# EAGLE board cradle project (EAGLE 7.7.0)
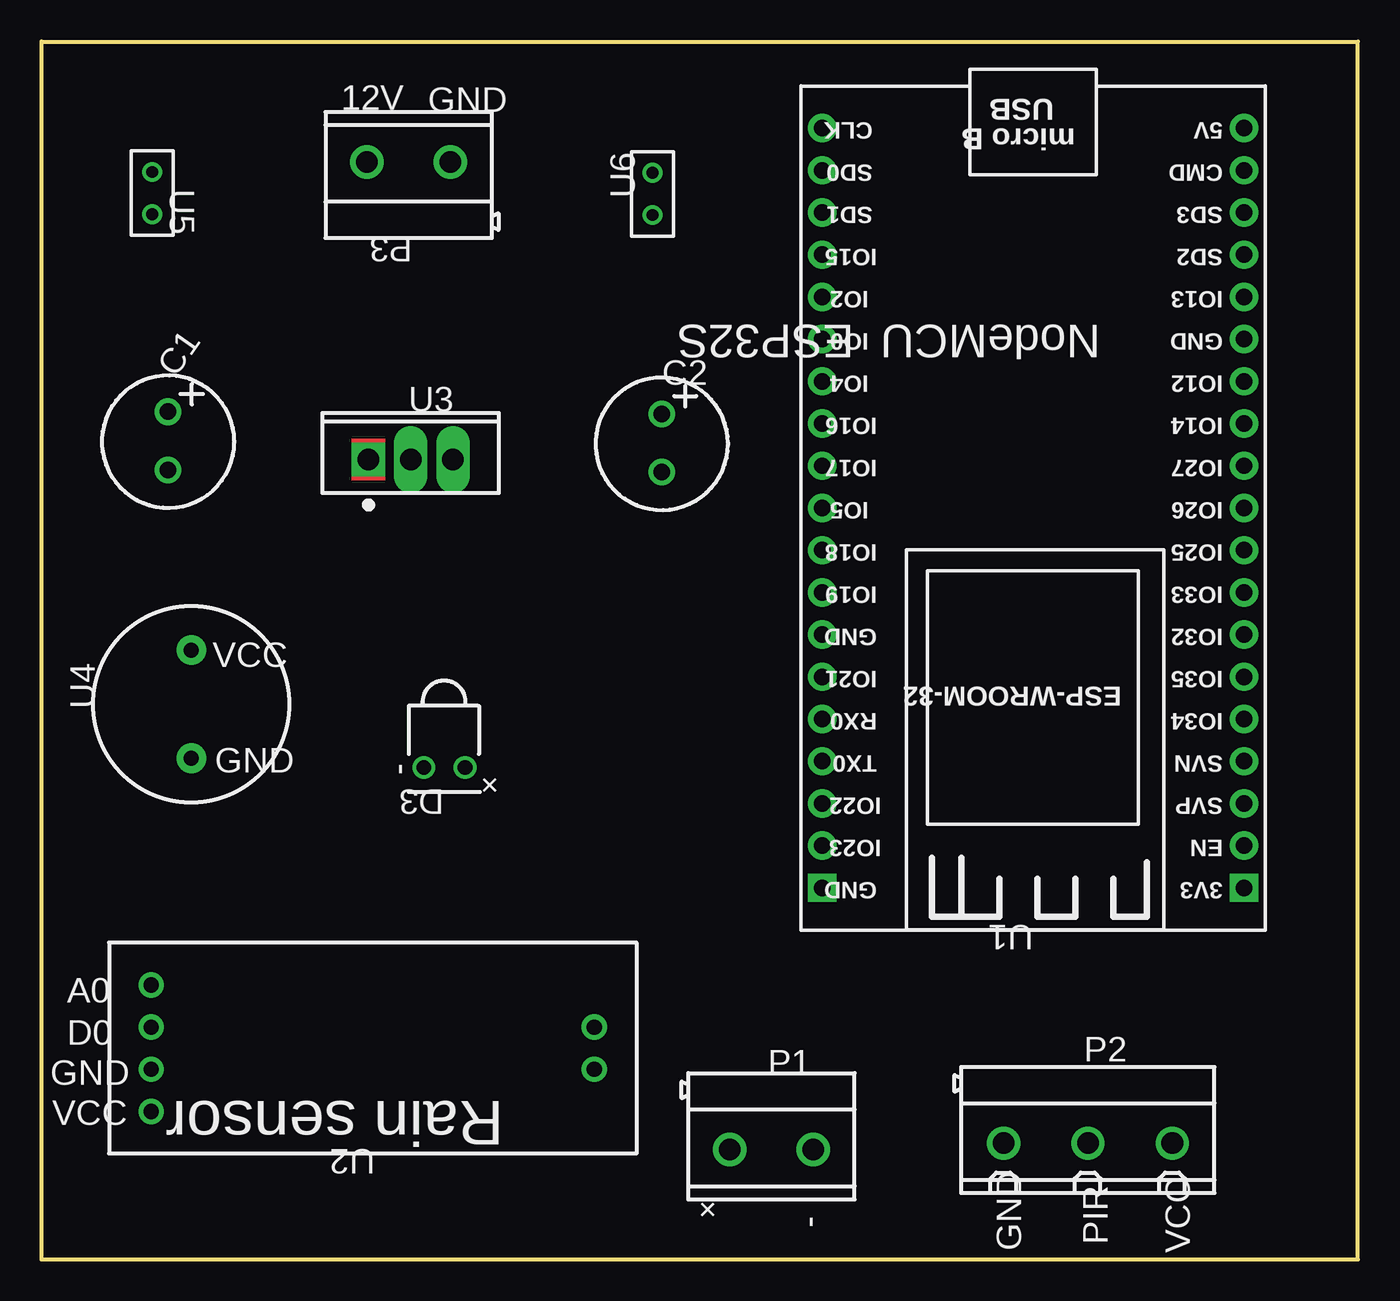
[diagram p0: board, top side]
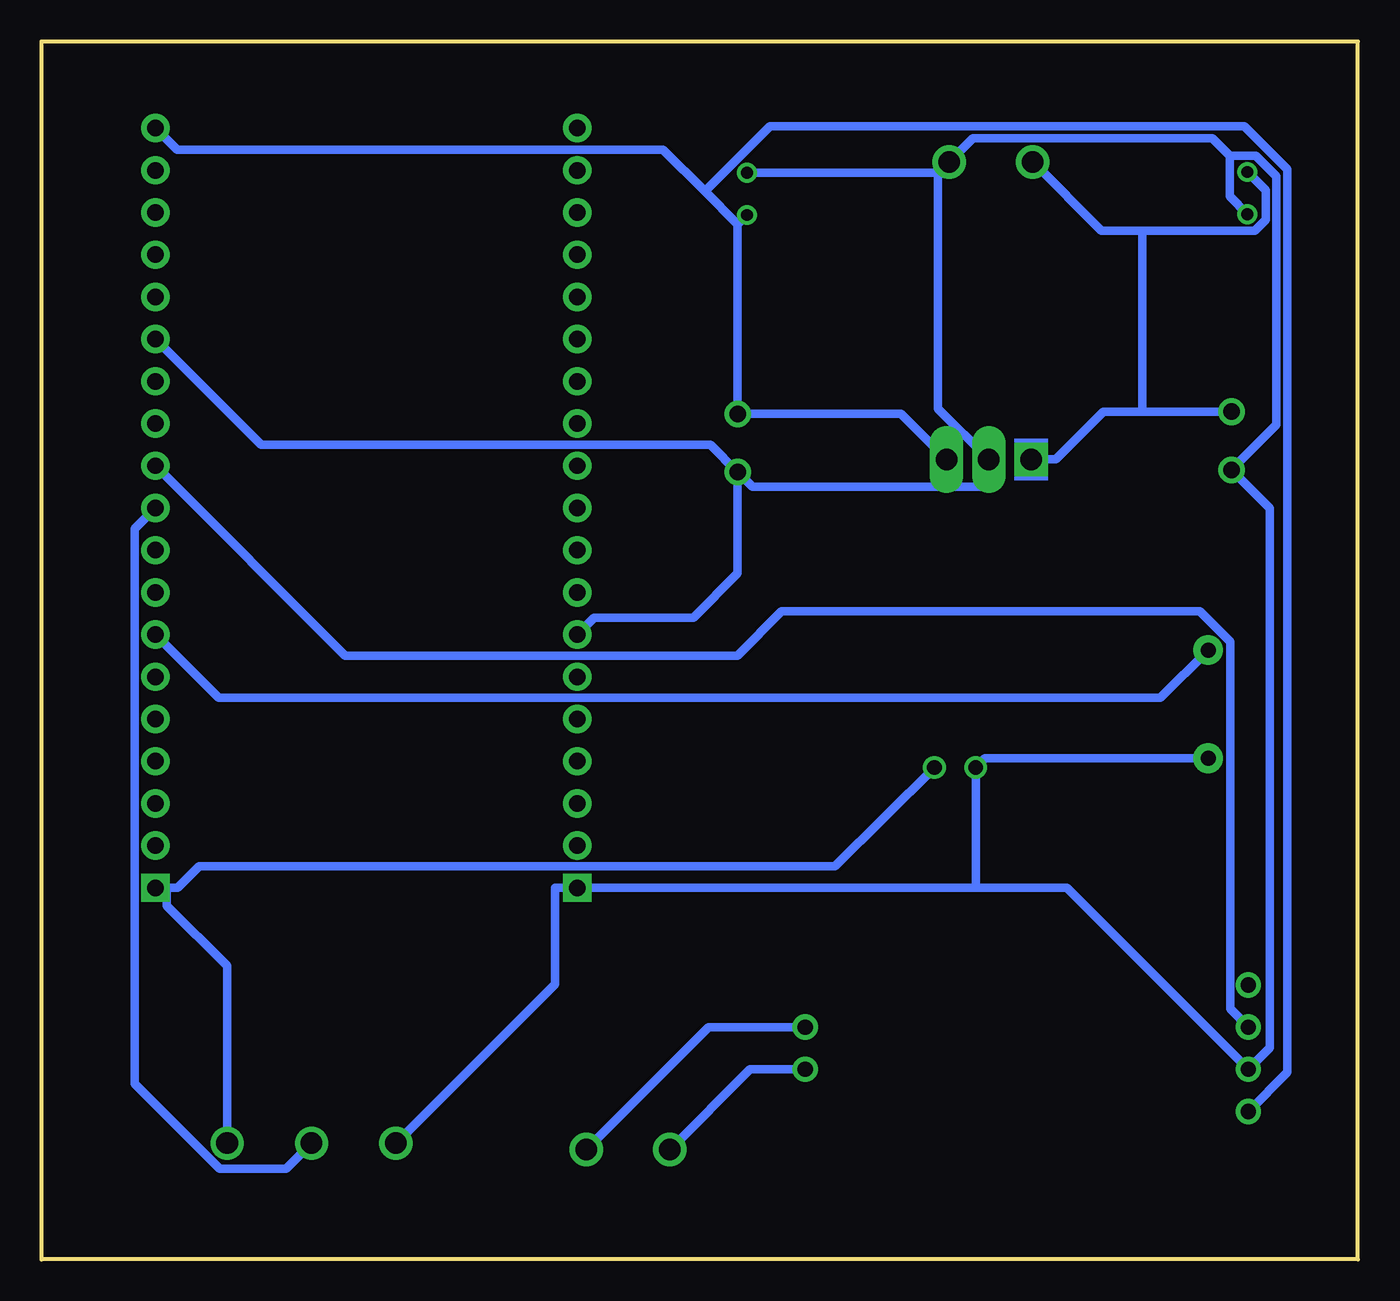
[diagram p1: board, bottom side, seen from below]

Size 79.25 x 73.28 mm. Coordinates in mm from the lower left corner, seen from the top.
Outline: 0,73.28 79.25,73.28 79.25,0 0,0 0,73.28
Copper layers (1*16): Top 0.035mm / dielectric 1.5mm / Bottom 0.035mm
Design rules "PCB_Cradle_2023-07-19 (1)": minimum track width 6mil, minimum drill 0.35mm, track to track 6mil, track to pad 6mil, pad to pad 6mil, via to via 6mil, smd to smd 6mil, copper to edge 40mil, drill to drill 6mil, minimum pad ring 0mil, minimum via ring 0mil, stop-mask expansion 4mil, vias tented up to drill 0mil, thermal gap 10mil

## Footprints (pad centres in the part's own frame; a part is rotated, then mirrored left to right if it is on the bottom)
CAP-D8.0XF3.5_1PRIMARY = drill 0.991 pad 1.6: 1 0,3.505; 2 0,0
LED-TH_LED-DP2-2LED_1PRIMARY = drill 0.889 pad 1.372: 1 -1.245,0; 2 1.245,0
P:EX80Y80D801 = drill 2.032 pad 2.032: 1 0,0
CONN-TH_2P-P5.00_1PRIMARY = drill 1.295 pad 2.007: 1 -2.515,0; 2 2.515,0
CONN-TH_3P-P5.00_1PRIMARY = drill 1.295 pad 2.007: 1 -5.08,0; 2 0,0; 3 5.08,0
NODEMCU-ESP32S_1PRIMARY = drill 0.991 pad 1.702 square: 1 2.54,-5.08; 38 27.94,-5.08 | drill 0.991 pad 1.702: 2 2.54,-7.62; 3 2.54,-10.16; 4 2.54,-12.7; 5 2.54,-15.24; 6 2.54,-17.78; 7 2.54,-20.32; 8 2.54,-22.86; 9 2.54,-25.4; 10 2.54,-27.94; 11 2.54,-30.48; 12 2.54,-33.02; 13 2.54,-35.56; 14 2.54,-38.1; 15 2.54,-40.64; 16 2.54,-43.18; 17 2.54,-45.72; 18 2.54,-48.26; 19 2.54,-50.8; 20 27.94,-50.8; 21 27.94,-48.26; 22 27.94,-45.72; 23 27.94,-43.18; 24 27.94,-40.64; 25 27.94,-38.1; 26 27.94,-35.56; 27 27.94,-33.02; 28 27.94,-30.48; 29 27.94,-27.94; 30 27.94,-25.4; 31 27.94,-22.86; 32 27.94,-20.32; 33 27.94,-17.78; 34 27.94,-15.24; 35 27.94,-12.7; 36 27.94,-10.16; 37 27.94,-7.62
RAIN_SENSOR_1PRIMARY = drill 0.914 pad 1.524: 1 13.335,-3.81; 2 13.335,-1.27; 3 13.335,1.27; 4 13.335,3.81; 5 -13.335,1.27; 6 -13.335,-1.27
TO-220IS_L10.16-W4.7-P2.54-L_1PRIMARY = drill 1.295 pad 2.007 square: 1 -2.54,0 | drill 1.295 pad 2.007 long: 2 0,0; 3 2.54,0
BUZZER-12MM_1PRIMARY = drill 0.889 pad 1.778: 1 3.251,0; 2 -3.251,0
RAD-0.1_1PRIMARY = drill 0.711 pad 1.194: 1 -1.041,0.178; 2 1.499,0.178

## Placement (x,y rotation side)
C1  CAP-D8.0XF3.5  [CAP-D8.0XF3.5_1PRIMARY]  7.62,47.5 0 top
C2  CAP-D8.0XF3.5  [CAP-D8.0XF3.5_1PRIMARY]  37.34,47.37 0 top
D3  LED-TH_LED-DP2-2LED  [LED-TH_LED-DP2-2LED_1PRIMARY]  24.26,29.59 180 top
DUMMY1  [P:EX80Y80D801]  76.71,69.34 0 top
DUMMY2  [P:EX80Y80D801]  76.45,3.68 0 top
DUMMY3  [P:EX80Y80D801]  2.67,3.43 0 top
DUMMY4  [P:EX80Y80D801]  3.05,70.23 0 top
P1  CONN-TH_2P-P5.00  [CONN-TH_2P-P5.00_1PRIMARY]  43.94,6.6 0 top
P2  CONN-TH_3P-P5.00  [CONN-TH_3P-P5.00_1PRIMARY]  62.99,6.99 0 top
P3  CONN-TH_2P-P5.00  [CONN-TH_2P-P5.00_1PRIMARY]  22.1,66.04 180 top
U1  NodeMCU_ESP32S  [NODEMCU-ESP32S_1PRIMARY]  74.93,17.27 180 top
U2  RAIN_SENSOR_COPY  [RAIN_SENSOR_1PRIMARY]  19.94,12.7 180 top
U3  TO-220IS_L10.16-W4.7-P2.54-L  [TO-220IS_L10.16-W4.7-P2.54-L_1PRIMARY]  22.23,48.13 0 top
U4  BUZZER-12MM  [BUZZER-12MM_1PRIMARY]  9.02,33.4 90 top
U5  RAD-0.1  [RAD-0.1_1PRIMARY]  6.48,64.39 270 top
U6  RAD-0.1  [RAD-0.1_1PRIMARY]  36.96,63.88 90 top

## Library data of the parts
C1 C2 D3 DUMMY1-DUMMY4 P1-P3 U1-U6 = PCB_Cradle_2023-07-19 (1)

## Nets
3V3: D3.1 P2.3 U1.1
5V: C2.1 U1.19 U2.4 U3.3 U6.1
12V: C1.1 P3.2 U3.1 U5.1
GND: C1.2 C2.2 D3.2 P2.1 P3.1 U1.14 U1.32 U1.38 U2.3 U3.2 U4.2 U5.2 U6.2
PIR: P2.2 U1.10
RAIN_A: U1.6
RAIN_D: U1.11 U2.2
U1_2: U1.2
U1_3: U1.3
U1_4: U1.4
U1_5: U1.5
U1_7: U1.7 U4.1
U1_8: U1.8
U1_9: U1.9
U1_12: U1.12
U1_13: U1.13
U1_15: U1.15
U1_16: U1.16
U1_17: U1.17
U1_18: U1.18
U1_20: U1.20
U1_21: U1.21
U1_22: U1.22
U1_23: U1.23
U1_24: U1.24
U1_25: U1.25
U1_26: U1.26
U1_27: U1.27
U1_28: U1.28
U1_29: U1.29
U1_30: U1.30
U1_31: U1.31
U1_33: U1.33
U1_34: U1.34
U1_35: U1.35
U1_36: U1.36
U1_37: U1.37
U2_5: P1.1 U2.5
U2_6: P1.2 U2.6

## Tracks (layer width: path | path; a pad name or v marks a point on that pad's centre or on a via)
3V3
  Bottom 0.5: D3.1 31.47,23.65 69.75,23.65 71.04,22.35 71.7,22.35 | 71.7,22.35 U1.1 | 71.7,22.35 71.7,21.29 68.07,17.65 P2.3
5V
  Bottom 0.5: 37.34,62.28 C2.1 27.51,50.88 U3.3 | 39.32,64.26 35.38,68.17 6.83,68.17 4.24,65.58 4.24,11.25 U2.4 | U6.1 37.34,62.28 | 37.34,62.28 39.32,64.26 | 39.32,64.26 41.83,66.78 71.09,66.78 U1.19
12V
  Bottom 0.5: U3.1 18.19,48.13 15.32,51 12.98,51 | U5.1 5.56,64.34 5.56,62.56 6.22,61.9 12.98,61.9 | 12.98,61.9 15.44,61.9 P3.2 | 12.98,51 12.98,61.9 | C1.1 12.98,51
GND
  Bottom 0.5: C2.2 38.99,49.02 66.04,49.02 U1.14 | 25.27,65.38 25.27,51.18 U3.2 22.23,46.48 36.45,46.48 C2.2 | 25.27,65.38 U6.2 | 25.27,65.38 P3.1 23.19,67.46 8.76,67.46 7.72,66.42 | 23.01,22.35 D3.2 22.45,30.15 U4.2 | 23.01,22.35 17.53,22.35 U2.3 5.31,12.73 5.31,45.19 C1.2 4.9,50.22 4.9,65.18 6.15,66.42 7.72,66.42 | 23.01,22.35 U1.38 48.34,22.35 48.34,16.56 P2.1 | U5.2 7.72,63.96 7.72,66.42 | C2.2 37.34,41.27 40.01,38.61 45.97,38.61 U1.32
PIR
  Bottom 0.5: U1.10 73.63,43.97 73.63,10.57 68.53,5.46 64.52,5.46 P2.2
RAIN_D
  Bottom 0.5: U2.2 7.7,15.06 7.7,37.16 9.53,38.99 34.7,38.99 37.36,36.32 60.96,36.32 U1.11
U1_7
  Bottom 0.5: U4.1 11.89,33.78 68.58,33.78 U1.7
U2_5
  Bottom 0.5: U2.5 36.6,11.43 P1.1
U2_6
  Bottom 0.5: U2.6 39.09,13.97 P1.2

## Text on the board
tPlace: 12V | GND | VCC | GND | - | + | A0 | D0 | GND | VCC | + | - | GND | PIR | VCC